# EAGLE board CAT9 Data Logger (EAGLE 9.6.2)
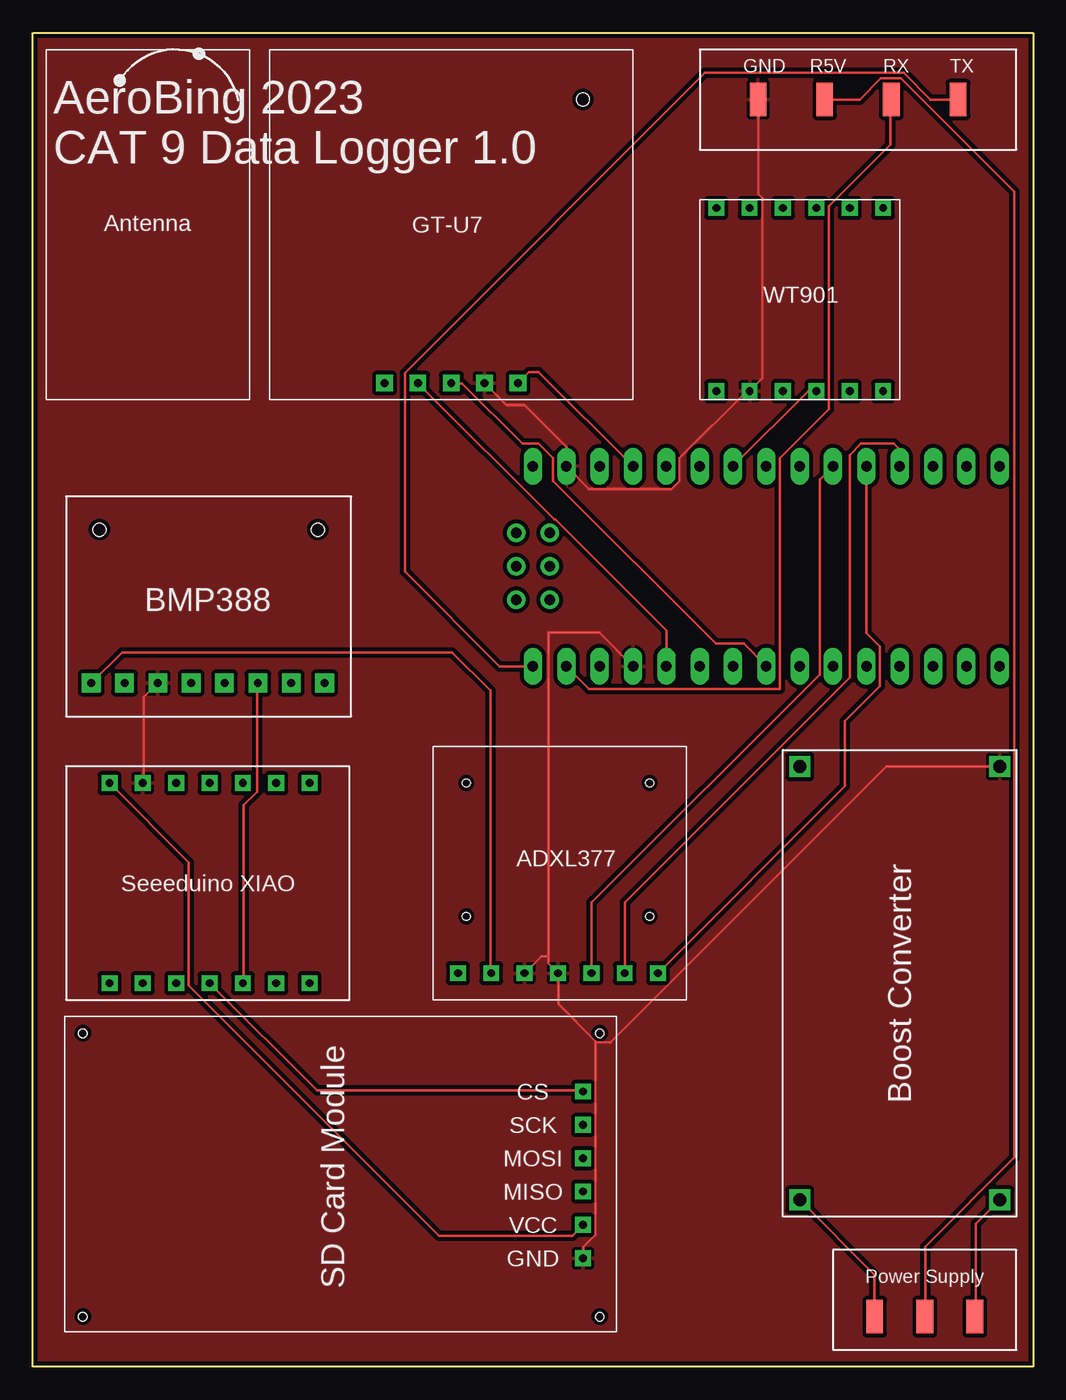
[diagram p0: board, top side]
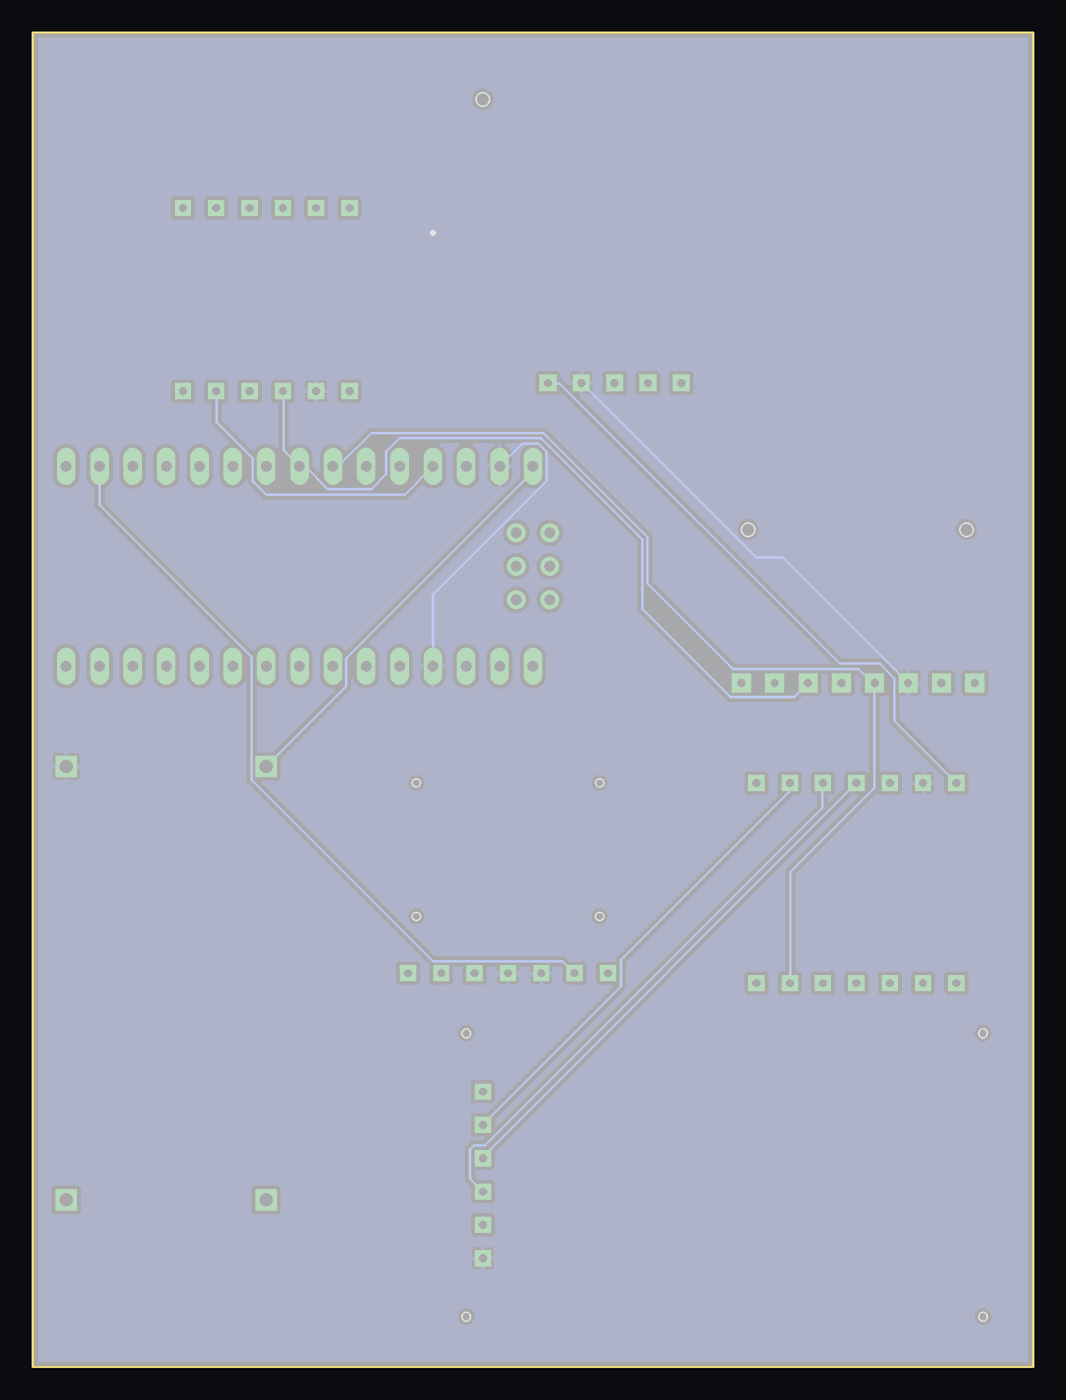
[diagram p1: board, bottom side, seen from below]

Size 76.2 x 101.6 mm. Coordinates in mm from the lower left corner, seen from the top.
Outline: 0,0 0,101.6 76.2,101.6 76.2,0 0,0
Copper layers (1*16): Top 0.035mm / dielectric 1.5mm / Bottom 0.035mm
Design rules "SparkFun": minimum track width 8mil, minimum drill 20mil, track to track 8mil, track to pad 8mil, pad to pad 8mil, via to via 8mil, smd to smd 8mil, copper to edge 8mil, drill to drill 8mil, minimum pad ring 12mil, minimum via ring 10mil, stop-mask expansion 4mil, vias tented up to drill 20mil, thermal gap 10mil

## Footprints (pad centres in the part's own frame; a part is rotated, then mirrored left to right if it is on the bottom)
NANO = drill 0.8 long: 3.3V -10.16,24.13; 5V -10.16,-1.27; A0 -10.16,19.05; A1 -10.16,16.51; A2 -10.16,13.97; A3 -10.16,11.43; A4 -10.16,8.89; A5 -10.16,6.35; A6 -10.16,3.81; A7 -10.16,1.27; AREF -10.16,21.59; D2 5.08,1.27; D3 5.08,3.81; D4 5.08,6.35; D5 5.08,8.89; D6 5.08,11.43; D7 5.08,13.97; D8 5.08,16.51; D9 5.08,19.05; D10 5.08,21.59; D11 5.08,24.13; D12 5.08,26.67; D13 -10.16,26.67; GND -10.16,-6.35; GND1 5.08,-1.27; RAW -10.16,-8.89; RST -10.16,-3.81; RST1 5.08,-3.81; RX1 5.08,-6.35; TX0 5.08,-8.89 | drill 0.8: ICSP1 -5.08,-10.16; ICSP2 -5.08,-7.62; ICSP3 -2.54,-10.16; ICSP4 -2.54,-7.62; ICSP5 0,-10.16; ICSP6 0,-7.62
BMP388 = drill 0.6 pad 1.422 square: 3V 4.445,2.54; CS 17.145,2.54; GND 6.985,2.54; INT 19.685,2.54; SCK 9.525,2.54; SDI 14.605,2.54; SDO 12.065,2.54; VIN 1.905,2.54 | hole 1: 2.54,14.224; 19.177,14.224
BOOST_CONVERTER = drill 1 square: +VIN 1.27,16.51; +VOUT 34.29,16.51; -VIN 1.27,1.27; -VOUT 34.29,1.27
ADXL377 = drill 0.6 square: 3V 4.445,2.032; GND 6.985,2.032; T 9.525,2.032; VIN 1.905,2.032; X 17.145,2.032; Y 14.605,2.032; Z 12.065,2.032 | hole 0.6: 2.54,16.51; 16.51,16.51; 16.51,6.35; 2.54,6.35
GT-U7 = drill 0.6 pad 1.27 square: GND 11.303,25.4; RX 13.843,25.4; TX 16.383,25.4; U 18.923,25.4; VCC 8.763,25.4 | hole 1: 3.81,3.81
WT901 = drill 0.6 square: D0 13.97,14.605; D1 1.27,14.605; D2 13.97,0.635; D3 1.27,0.635; GND1 3.81,14.605; GND2 3.81,0.635; RX 8.89,14.605; SCL 8.89,0.635; SDA 6.35,0.635; TX 6.35,14.605; VCC1 11.43,14.605; VCC2 11.43,0.635
RFD900X_PORT = smd 1.27 x 2.54: GND 4.445,3.81; R5V 9.525,3.81; RX 14.605,3.81; TX 19.685,3.81
POWER_SUPPLY = smd 1.27 x 2.54: 3V 3.175,2.54; 5V 6.985,2.54; GND 10.795,2.54
SEEEDUINO_XIAO = drill 0.6 square: 3V 13.208,1.27; 5V 18.288,1.27; A0 18.288,16.51; A1 15.748,16.51; A2 13.208,16.51; A3 10.668,16.51; GND 15.748,1.27; MISO 8.128,1.27; MOSI 10.668,1.27; RX 3.048,1.27; SCK 5.588,1.27; SCL 5.588,16.51; SDA 8.128,16.51; TX 3.048,16.51
SD_CARD_MODULE = drill 0.6 square: CS 2.54,5.715; GND 2.54,18.415; MISO 2.54,13.335; MOSI 2.54,10.795; SCK 2.54,8.255; VCC 2.54,15.875 | hole 0.65: 1.27,22.86; 1.27,1.27; 40.64,1.27; 40.64,22.86

## Placement (x,y rotation side)
U$1  NANO  [NANO]  46.99,58.42 270 top
U$2  BMP388  [BMP388]  2.54,49.53 0 top
U$3  BOOST_CONVERTER  [BOOST_CONVERTER]  74.93,11.43 90 top
U$5  ADXL377  [ADXL377]  30.48,27.94 0 top
U$6  GT-U7  [GT-U7]  45.72,100.33 180 top
U$7  WT901  [WT901]  50.8,73.66 0 top
U$8  RFD900X_PORT  [RFD900X_PORT]  50.8,92.71 0 top
U$9  POWER_SUPPLY  [POWER_SUPPLY]  60.96,1.27 0 top
U$10  SEEEDUINO_XIAO  [SEEEDUINO_XIAO]  24.13,45.72 180 top
U$11  SD_CARD_MODULE  [SD_CARD_MODULE]  44.45,26.67 180 top

## Library data of the parts
U$1 = Arduino-clone
U$2 = CUSTOM BMP388
U$3 = CUSTOM DC BOOST CONVERTER
U$5 = CUSTOM ADXL377
U$6 = CUSTOM GT-U7
U$7 = CUSTOM WT901
U$8 = CUSTOM RFD900X PORT
U$9 = CUSTOM POWER SUPPLY
U$10 = CUSTOM SEEEDUINO XIAO
U$11 = CUSTOM SD CARD MODULE

## Nets
3.3-6VI: U$3.+VIN U$9.3V
3.3V: U$1.3.3V U$2.VIN U$5.3V
5V: U$1.5V U$6.VCC U$7.VCC2 U$10.5V U$11.VCC
5VI: U$8.R5V U$9.5V
7.5V: U$1.RAW U$3.+VOUT
D3: U$10.A3 U$11.CS
D8: U$10.SCK U$11.SCK
D9: U$10.MISO U$11.MISO
D10: U$10.MOSI U$11.MOSI
GND [New Class]: U$1.GND U$1.GND1 U$2.GND U$3.-VOUT U$5.GND U$5.T U$6.GND U$7.GND2 U$8.GND U$10.GND U$11.GND
GNDI: U$3.-VIN U$9.GND
RX: U$1.RX1 U$8.RX
RXD: U$1.D5 U$6.RX
SCL: U$1.A5 U$2.SCK U$7.SCL U$10.SCL
SDA: U$1.A4 U$2.SDI U$7.SDA U$10.SDA
TX: U$1.TX0 U$8.TX
TXD: U$1.D2 U$6.TX
X: U$1.A1 U$5.X
Y: U$1.A0 U$5.Y
Z: U$1.A2 U$5.Z

## Tracks (layer width: path | path; a pad name or v marks a point on that pad's centre or on a via)
3.3-6VI
  Top 0.203: U$3.+VIN 64.11,7.01 64.11,3.86 U$9.3V
3.3V
  Top 0.203: U$5.3V 34.85,29.97 34.85,51.51 31.95,54.41 6.81,54.41 6.79,54.41 U$2.VIN
  Bottom 0.203: U$1.3.3V 71.12,65.63 59.54,54.05 59.54,44.7 45.72,30.89 35.87,30.89 34.95,29.97 U$5.3V
5V
  Top 0.203: U$6.VCC 37.8,75.77 38.53,75.77 U$1.5V | U$11.VCC 41.1,9.98 30.96,9.98 11.89,29.06 11.89,38.41 U$10.5V
  Bottom 0.203: U$1.5V 47.85,66.45 58.42,66.45 59.44,67.46 59.44,69.19 62.18,71.93 62.18,74.27 U$7.VCC2 | U$10.5V 10.57,49.17 10.57,52.43 11.68,53.54 14.73,53.54 36.07,74.88 36.88,74.88 U$6.VCC
5VI
  Top 0.203: U$8.R5V 62.99,96.52 64.62,98.15 66.14,98.15 74.78,89.51 74.78,15.95 67.97,9.14 67.97,3.86 U$9.5V
7.5V
  Bottom 0.203: U$1.RAW 38.1,68.17 52.32,53.95 52.32,51.82 U$3.+VOUT
D3
  Top 0.203: U$10.A3 21.64,21.03 41.86,21.03 U$11.CS
D8
  Bottom 0.203: U$10.SCK 18.59,44.4 18.59,43.79 31.39,30.99 31.39,28.96 41.86,18.49 U$11.SCK
D9
  Bottom 0.203: U$10.MISO 16.05,44.4 16.05,42.57 41.76,16.87 42.57,16.87 42.88,16.56 42.88,14.33 41.96,13.41 U$11.MISO
D10
  Bottom 0.203: U$10.MOSI 41.96,15.95 U$11.MOSI
GND
  Top 0.203: 39.27,31.24 39.27,30.71 U$5.T 40.03,29.97 40.03,27.64 42.88,24.79 42.88,24.69 | 39.27,31.24 38.73,31.24 U$5.GND | 42.88,24.69 42.88,10.06 41.96,9.14 41.96,8.33 U$11.GND | U$3.-VOUT 65.02,45.72 43.99,24.69 42.88,24.69 | U$10.GND 8.43,44.5 8.43,51 9.45,52.02 U$2.GND | U$6.GND 34.44,74.88 36.07,73.25 37.44,73.25 40.64,70.05 U$1.GND 42.37,66.85 48.67,66.85 49.28,67.46 49.28,69.19 54.36,74.27 54.56,74.27 U$7.GND2 54.66,74.37 55.58,75.29 55.58,89 55.27,89.31 55.27,96.52 U$8.GND | 39.27,31.24 39.27,55.91 43.16,55.91 U$1.GND1
  Bottom 0.203: U$1.GND1 45.72,58.83 37.08,67.46 37.08,69.7 37.69,70.31 38.91,70.31 U$1.GND | U$2.GND 9.55,52.12 19.05,61.62 21.08,61.62 34.34,74.88 U$6.GND
  pour Top (isolate 0.305): 0,101.6 76.2,101.6 76.2,0 0,0
  pour Bottom (isolate 0.305): 0,0 76.2,0 76.2,101.6 0,101.6
GNDI
  Top 0.203: U$3.-VIN 71.83,10.87 71.83,3.86 U$9.GND
RX
  Top 0.203: U$1.RX1 42.37,51.61 56.9,51.61 56.9,69.19 60.66,72.95 60.66,88.39 65.33,93.07 65.33,96.52 U$8.RX
RXD
  Top 0.203: U$1.D5 54.15,55.07 52.02,55.07 39.62,67.46 39.62,69.19 38.51,70.31 37.29,70.31 32.72,74.88 31.9,74.88 U$6.RX
SCL
  Top 0.203: U$1.A5 59.03,74.27 59.64,74.27 U$7.SCL
  Bottom 0.203: U$10.SCL 18.49,29.26 18.49,37.69 12.09,44.09 12.09,52.02 U$2.SCK 12.19,52.02 13.31,53.14 22.86,53.14 29.36,59.64 29.36,63.2 37.29,71.12 50.39,71.12 52.93,68.58 U$1.A5
SDA
  Top 0.203: U$10.SDA 16.05,29.26 16.05,42.77 17.07,43.79 17.07,52.02 U$2.SDI
  Bottom 0.203: U$7.SDA 57.1,74.27 57.1,69.8 U$1.A4 55.47,68.58 53.75,66.85 50.39,66.85 49.28,67.97 49.28,69.7 48.26,70.71 37.49,70.71 29.77,62.99 29.77,57.71 23.06,51 18.19,51 17.17,52.02 U$2.SDI
TX
  Top 0.203: U$8.TX 68.38,96.52 66.34,98.55 51.21,98.55 28.35,75.69 28.35,60.55 35.56,53.34 U$1.TX0
TXD
  Top 0.203: U$1.D2 48.26,56.08 39.83,64.52 39.73,64.52 29.36,74.88 U$6.TX
X
  Top 0.203: U$5.X 61.87,44.22 61.87,49.2 64.52,51.84 64.52,54.86 63.5,55.88 U$1.A1
Y
  Top 0.203: U$1.A0 66.04,69.85 65.58,70.31 63.09,70.31 62.23,69.44 62.23,52.48 45.11,35.36 45.11,29.97 U$5.Y
Z
  Top 0.203: U$1.A2 59.94,67.56 59.94,52.73 42.57,35.36 42.57,29.97 U$5.Z

## Text on the board
tPlace: AeroBing 2023 / CAT 9 Data Logger 1.0